# Altium PCB l7.pcbdoc
Units mil, origin at the board's own origin, x right, y up, seen from the top; angles counter-clockwise.
Board outline 5320 x 4735 mil, 2 copper layers (Top Layer, Bottom Layer); 16 components, 43 nets, 88 pads, 5 vias.
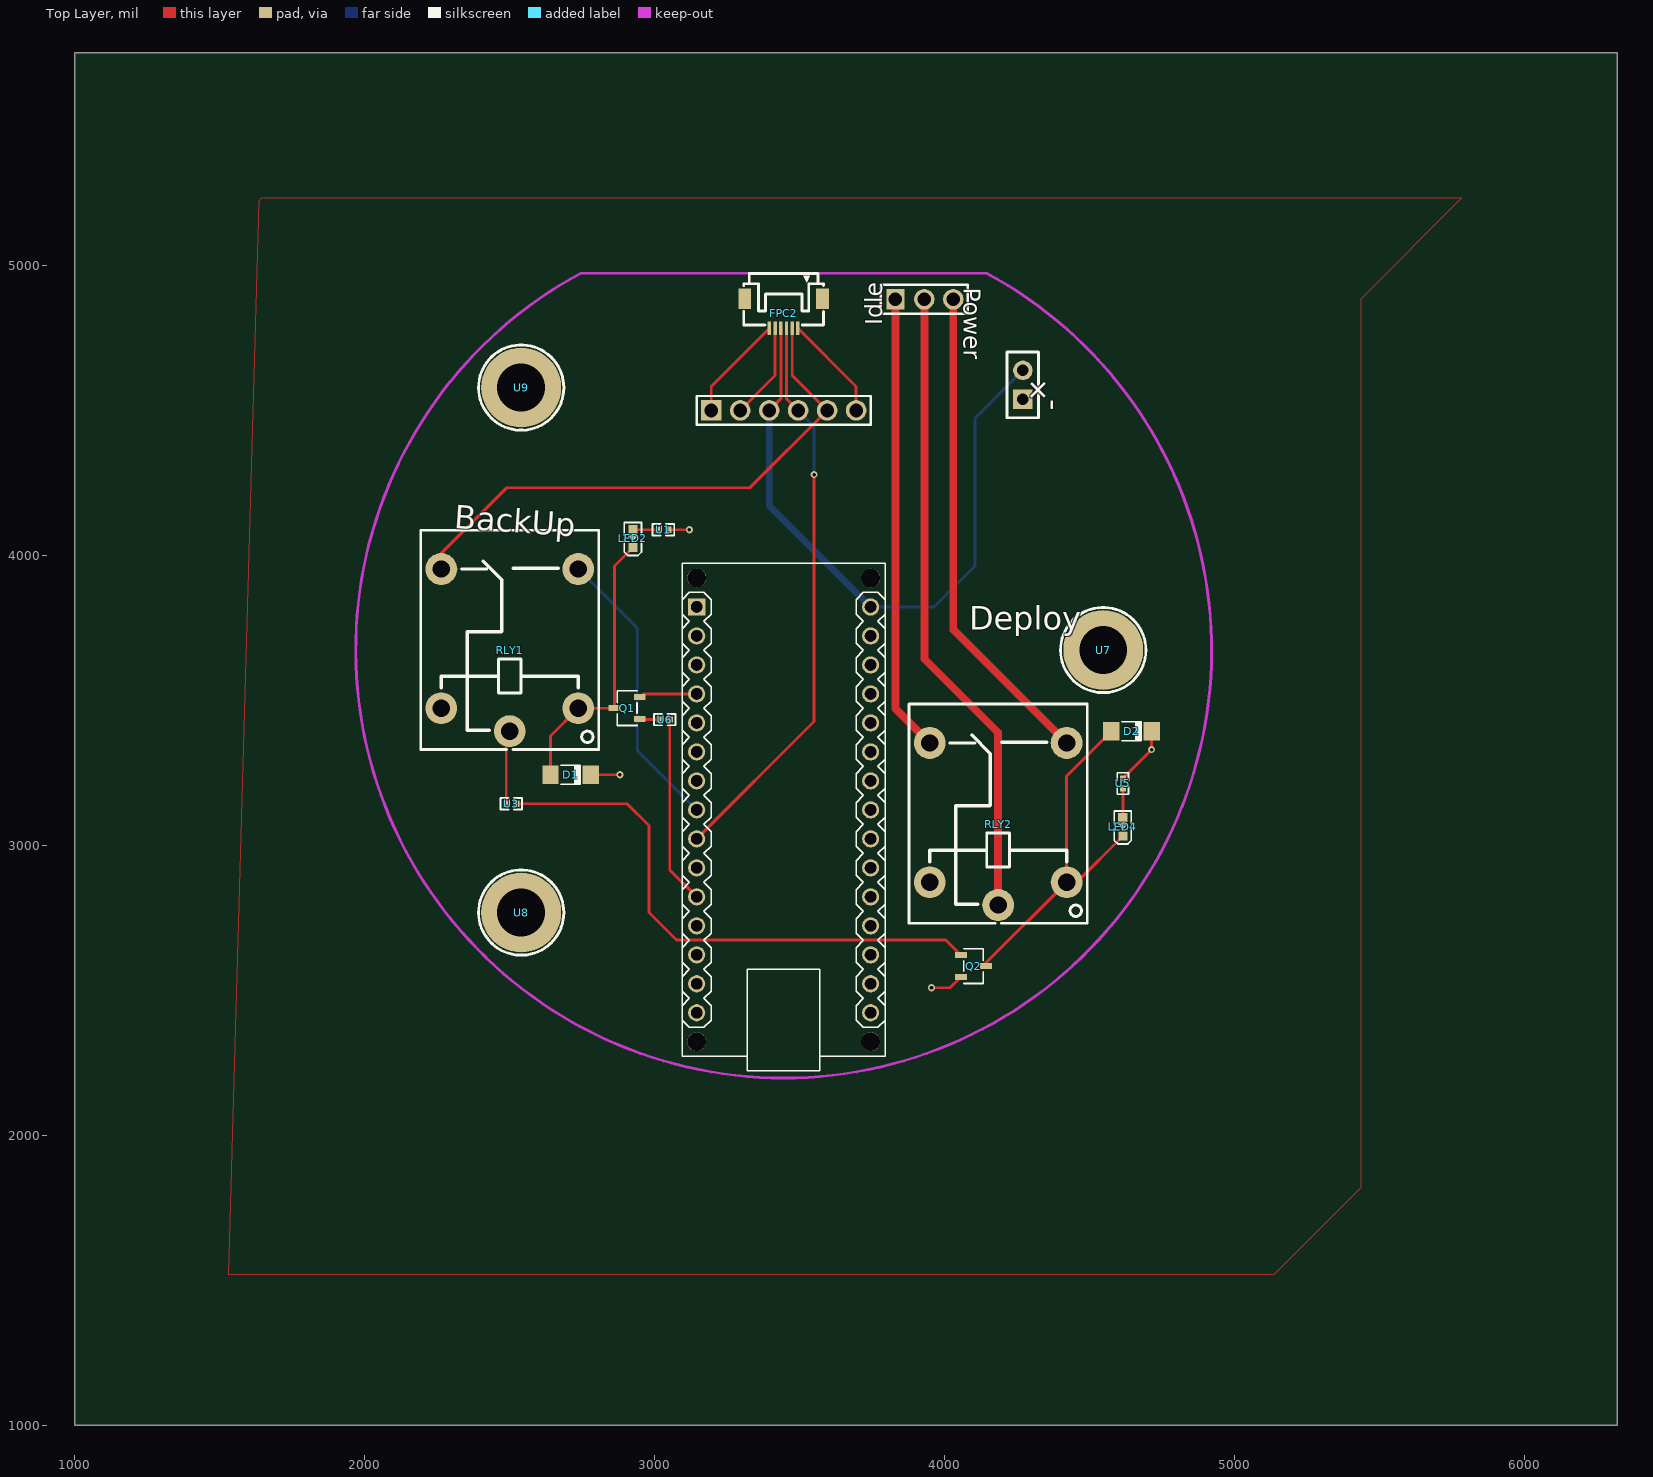
[diagram p0: Top Layer view]
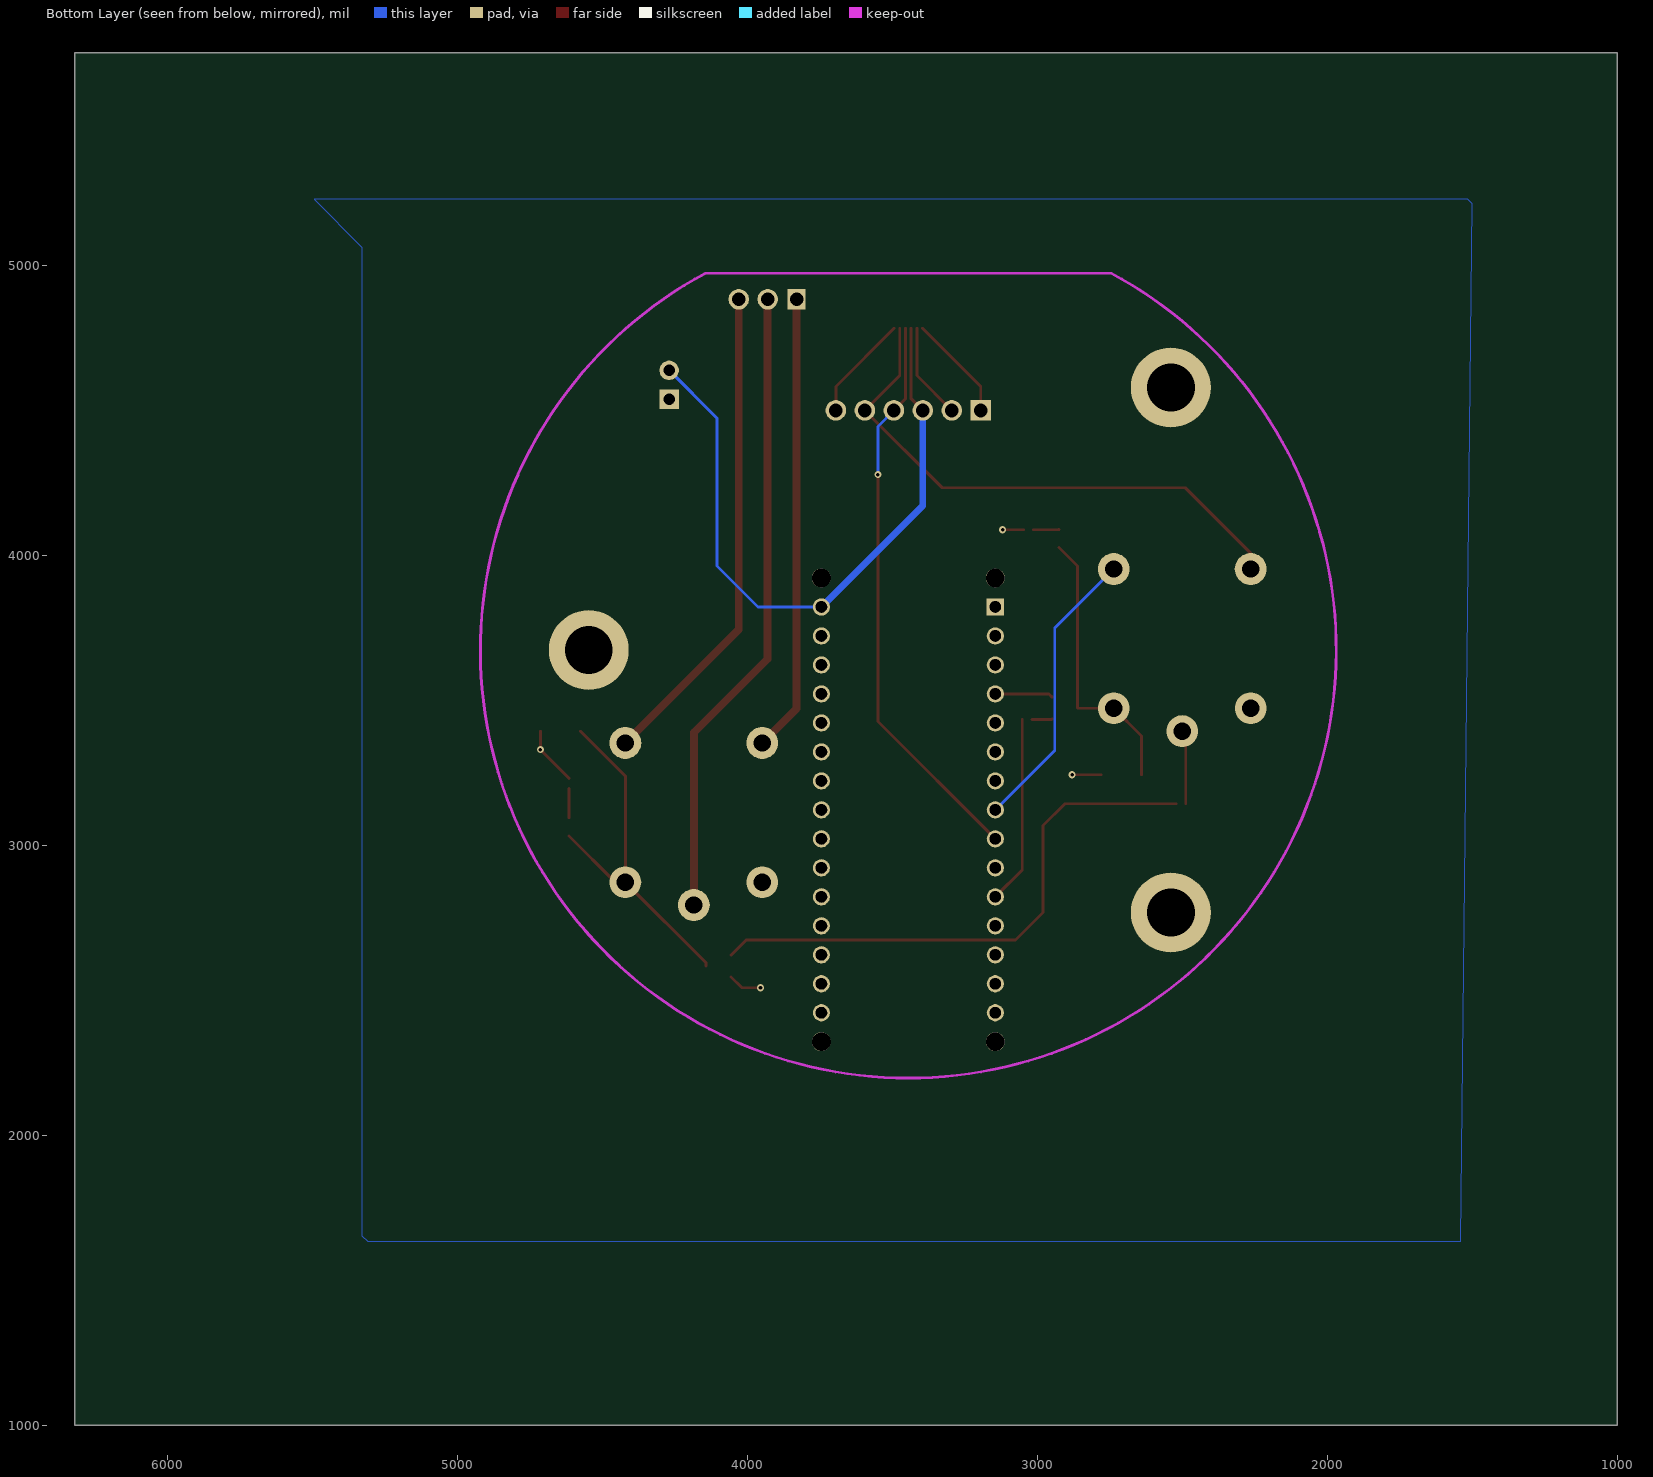
[diagram p1: Bottom Layer view, seen from below]

## Layer stack, top to bottom
Top Layer: signal copper (thickness not stored)
Dielectric: dielectric 12.6, FR-4, Dk 4.8
Bottom Layer: signal copper (thickness not stored)

## Board outline
6320,1000 1000,1000 1000,5735 6320,5735

## Components (designator, comment, footprint, x,y, rotation, side; value= is the part's Value field where it differs from the comment)
D1 "PMLL4148L,115" SOD-80_L3.5-W1.5-RD 2710,3245 r180 top
D2 "PMLL4148L,115" SOD-80_L3.5-W1.5-RD 4645,3395 r180 top
FPC2 "FFC05020-06SBB123W5M-C" FFC-SMD_6P-P0.50_FFC05020-06SBB123W5M 3445,4836.41 r180 top
LED2 "L-C191MJRCT" LED0603-RD_RED 2925,4060 r90 top
LED4 "L-C191MJRCT" LED0603-RD_RED 4615,3065 r90 top
Q1 "S8050M-D" SOT-23-3_L3.0-W1.7-P0.95-LS2.9-BR 2905,3475 r0 top
Q2 "S8050M-D" SOT-23-3_L3.0-W1.7-P0.95-LS2.9-BR 4100,2585 r180 top
RLY1 "SRD-05VDC-SL-C" RELAY-TH_SRD-XXVDC-XL-C 2500.12,3675 r90 top
RLY2 "SRD-05VDC-SL-C" RELAY-TH_SRD-XXVDC-XL-C 4185,3075 r90 top
U1 "1kΩ" R0402 3030,4090 r0 top
U3 "1kΩ" R0402 2505,3145 r0 top
U5 "1kΩ" R0402 4615,3215 r90 top
U6 "1kΩ" R0402 3035,3435 r180 top
U7 "MH_M4_S" MH_M4_PCB 4547.36,3675 r0 top
U8 "MH_M4_S" MH_M4_PCB 2539.49,2769.49 r0 top
U9 "MH_M4_S" MH_M4_PCB 2539.49,4580.51 r0 top

## Footprints (in the part's own frame and the unit in brackets; to place one, negate y for a bottom-side part, rotate by r counter-clockwise, add the part's x,y. Pads: shape width x height; smd on the part's side, far side on the other; paste and mask are expansions set on the pad)
FFC-SMD_6P-P0.50_FFC05020-06SBB123W5M [mm]
  rect 0.3x1.2 smd paste+0 mask+0.051: 1(-1.25,1.3) 2(-0.75,1.3) 3(-0.25,1.3) 4(0.25,1.3) 5(0.75,1.3) 6(1.25,1.3)
  rect 1.1x1.8 smd paste+0 mask+0.051: 7(3.4,-1.3) 8(-3.4,-1.3)
  silkscreen extent -3.5,-3.5 3.5,1
LED0603-RD_RED [mm]
  rect 0.8x0.8 smd paste+0 mask+0.051: 1(-0.799,-0.003) 2(0.799,0.004)
  silkscreen extent -1.49,-0.75 1.39,0.76
MH_M4_PCB [mm]
  round 7 hole 4.2 paste+0 mask+0.051: 1(0,0)
  silkscreen extent -3.74,-3.73 3.74,3.73
R0402 [mm]
  rect 0.566x0.54 smd paste-100 mask+0.051: 1(-0.433,0) 2(0.433,0)
  silkscreen extent -0.94,-0.5 0.94,0.5
RELAY-TH_SRD-XXVDC-XL-C [mil]
  round 110 hole 60 paste+0 mask+2: 1(-200.79,-236.22) 2(279.53,-236.2) 3(279.53,236.2) 4(-200.79,236.22) 5(-279.53,0)
  silkscreen extent -342,-307 413,307
SOD-80_L3.5-W1.5-RD [mm]
  rect 1.44x1.62 smd paste+0 mask+0.051: 1(-1.765,0) 2(1.765,0)
  silkscreen extent -0.84,-0.83 0.84,0.83
SOT-23-3_L3.0-W1.7-P0.95-LS2.9-BR [mm]
  rect 1.037x0.532 smd paste+0 mask+0.051: 1(1.101,-0.95) 2(1.101,0.95) 3(-1.101,0)
  silkscreen extent -0.86,-1.53 0.86,1.53

## Free pads (board coordinates)
  rect 70.87x70.87 hole 47.24 paste+0 mask+2: 1(3195,4501.77)
  rect 62x70.87 hole 47.24 paste+0 mask+2: 1(3830,4885)
  rect 66.93x66.93 hole 39.37 paste+0 mask+2: 1(4270,4540)
  round 70.87 hole 47.24 paste+0 mask+2: 2(3295,4501.77) 2(3930,4885) 3(3395,4501.77) 3(4030,4885) 4(3495,4501.77) 5(3595,4501.77) 6(3695,4501.77)
  round 66.93 hole 39.37 paste+0 mask+2: 2(4270,4640)
  rect 59.37x59.37 hole 39.36 paste+0 mask+2: J1.1(3145,3823.82)
  round 59.37 hole 39.36 paste+0 mask+2: J1.2(3145,3723.82) J1.3(3145,3623.82) J1.4(3145,3523.82) J1.5(3145,3423.82) J1.6(3145,3323.82) J1.7(3145,3223.82) J1.8(3145,3123.82) J1.9(3145,3023.82) J1.10(3145,2923.82) J1.11(3145,2823.82) J1.12(3145,2723.82) J1.13(3145,2623.82) J1.14(3145,2523.82) J1.15(3145,2423.82) J2.1(3745,3823.82) J2.2(3745,3723.82) J2.3(3745,3623.82) J2.4(3745,3523.82) J2.5(3745,3423.82) J2.6(3745,3323.82) J2.7(3745,3223.82) J2.8(3745,3123.82) J2.9(3745,3023.82) J2.10(3745,2923.82) J2.11(3745,2823.82) J2.12(3745,2723.82) J2.13(3745,2623.82) J2.14(3745,2523.82) J2.15(3745,2423.82)
  round 65 hole 65 unplated paste+0: ""(3145,2323.82) ""(3145,3923.82) ""(3745,2323.82) ""(3745,3923.82)

## Via types
v1: diameter 24.41, hole 12.2, Top Layer to Bottom Layer, tented both sides, 5 vias

## Nets (pads, with @x,y where several pads share a name; then routed paths per layer and width w, separated by ;. In a path a pad name is that pad's centre, name@x,y a point inside that pad or via, vN(x,y) a via of type N, cw(c..) or ccw(c..) an arc to the next point about the centre after c; other vN are vias at no path point)
3.3V: FPC2.5 pad.2@3295,4501.77 | length 333.4
  Top Layer w10: pad.2@3295,4501.77 3415.47,4622.24 FPC2.5
5V: D1.1 D2.1 FPC2.6 pad.1@3195,4501.77 pad.J2.4 RLY1.4 RLY2.4 U1.2 U5.2 | length 744.3
  Top Layer w10: D1.1 v1(2880,3245) ; U1.2 v1(3120,4090) ; pad.1@3195,4501.77 3195,4584.44 FPC2.6 ; U5.2 v1(4714.49,3331.53) D2.1
BACKUPRELAYCTRL: pad.J1.11 U6.1 | length 649.7
  Top Layer w10: U6.1 3052.04,2916.78 pad.J1.11
CONTROLOUT: pad.J1.10
D1_2: D1.2 LED2.1 Q1.3 RLY1.1 | length 974
  Top Layer w10: D1.2 2640.51,3378.38 RLY1.1 ; RLY1.1 Q1.3 ; Q1.3 2861.64,3965.03 LED2.1
D5: FPC2.3 pad.4 pad.J1.9 | length 1968.6
  Top Layer w10: pad.J1.9 3550,3428.82 v1(3550,4280) ; FPC2.3 3454.84,4541.93 pad.4
  Bottom Layer w10: pad.4 3550,4446.77 v1(3550,4280)
D6: FPC2.2 pad.5 RLY1.3 | length 1923
  Top Layer w10: RLY1.3 2263.9,4008.9 2490,4235 3328.2,4235 pad.5 ; FPC2.2 3474.53,4622.24 pad.5
DEPLOY: RLY1.5 U3.1 | length 255.5
  Top Layer w10: U3.1 2487.96,3383.31 RLY1.5
DEPLOYRELAYCTRL: pad.J1.8 RLY1.2 | length 1000
  Bottom Layer w10: RLY1.2 2940,3750.85 2940,3328.82 pad.J1.8
GND: FPC2.1 pad.1@4270,4540 pad.6 pad.J1.4 pad.J2.2 Q1.2 Q2.2 U7.1 U8.1 U9.1 | length 685.2
  Top Layer w10: Q1.2 2959.78,3523.82 pad.J1.4 ; FPC2.1 3695,4584.4 pad.6 ; v1(3955,2510) 4019.04,2510 Q2.2
IDLE: pad.1@3830,4885 RLY2.3 | length 1579.7
  Top Layer w27.56: pad.1@3830,4885 3830,3473.3 RLY2.3
LED4_2: LED4.2 U5.1 | length 101.5
  Top Layer w10: LED4.2 U5.1
M1_J1.1: pad.J1.1
M1_J1.2: pad.J1.2
M1_J1.3: pad.J1.3
M1_J1.5: pad.J1.5
M1_J1.6: pad.J1.6
M1_J1.7: pad.J1.7
M1_J1.12: pad.J1.12
M1_J1.13: pad.J1.13
M1_J1.14: pad.J1.14
M1_J1.15: pad.J1.15
M1_J2.3: pad.J2.3
M1_J2.5: pad.J2.5
M1_J2.6: pad.J2.6
M1_J2.7: pad.J2.7
M1_J2.8: pad.J2.8
M1_J2.9: pad.J2.9
M1_J2.10: pad.J2.10
M1_J2.11: pad.J2.11
M1_J2.12: pad.J2.12
M1_J2.13: pad.J2.13
M1_J2.14: pad.J2.14
M1_J2.15: pad.J2.15
PWR: pad.3@4030,4885 RLY2.2 | length 1692.5
  Top Layer w27.56: pad.3@4030,4885 4030,3745.73 RLY2.2
Q2_1: Q2.1 U3.2 | length 1926.8
  Top Layer w10: U3.2 2905,3145 2980,3070 2980,2770 3075,2675 4004.04,2675 Q2.1
RLY2_1: D2.2 LED4.1 Q2.3 RLY2.1 | length 1248.9
  Top Layer w10: Q2.3 4143.36,2596.35 RLY2.1 ; D2.2 4421.22,3240.71 RLY2.1 ; LED4.1 4455.83,2874.21 RLY2.1
RLY2_5: pad.2@3930,4885 RLY2.5 | length 2195.1
  Top Layer w27.56: pad.2@3930,4885 3930,3645 4185,3390 RLY2.5
S$2248: 
S$3112: 
U1_1: LED2.2 U1.1 | length 88.7
  Top Layer w10: LED2.2 2926.34,4090 U1.1
U6_2: Q1.1 U6.2 | length 70.7
  Top Layer w10: Q1.1 2950.96,3435 U6.2
VIN: FPC2.4 pad.2@4270,4640 pad.3@3395,4501.77 pad.J2.1 | length 2284.8
  Top Layer w10: pad.3@3395,4501.77 3435.16,4541.93 FPC2.4
  Bottom Layer w10: pad.J2.1 3963.82,3823.82 4105,3965 4105,4475 pad.2@4270,4640
  Bottom Layer w23.62: pad.3@3395,4501.77 3395,4173.82 pad.J2.1
pads on no net: FPC2.7 FPC2.8
copper on no net: | length 0.1

## Polygon pours and split planes (outlines as drawn)
GND on Bottom Layer (solid): 1500,5215 1515,5230 5495,5230 5330,5065 5330,1655 5310,1635 1540,1635
5V on Mid-Layer 2 (solid): 1650,5130 1655,5135 5275,5135 5820,4590 5820,2830 4875,1885 4875,1500 4565,1810 1695,1810
GND on Mid-Layer 1 (solid): 1805,5085 1810,5080 5385,5080 5050,4745 5050,1925 4995,1980 1720,1980
GND on Top Layer (solid): 1635,5225 1645,5235 5785,5235 5435,4885 5435,1820 5135,1520 1530,1520

## Keep-outs
Keep-Out Layer:
  lines w10 net S$2248: 2745.05,4974.9 ccw(c3445,3675) 4144.95,4974.91

## Silkscreen, mask and mechanical layers (free items; w line width, h text height)
Top Overlay:
  drawing of 218 lines, arcs and shapes, not listed
  text "Power" at 4065.47,4925 h59.05 r270
  text "Idle" at 3784.53,4795 h59.05 r90
  text "+" at 4331.72,4628.28 h80 r225
  text "-" at 4400,4500 h80 r90
  text "BackUp" at 2307.21,4095.1 h80 r356
  text "Deploy" at 4085,3745 h80